# Altium PCB antivape_testbench.PcbDoc
Units mm, origin at the board's own origin, x right, y up, seen from the top; angles counter-clockwise.
Board outline 55 x 37 mm, 2 copper layers (Top Layer, Bottom Layer); 48 components, 19 nets, 162 pads, 0 vias.
Unrouted connection lines stored in the file: 98.
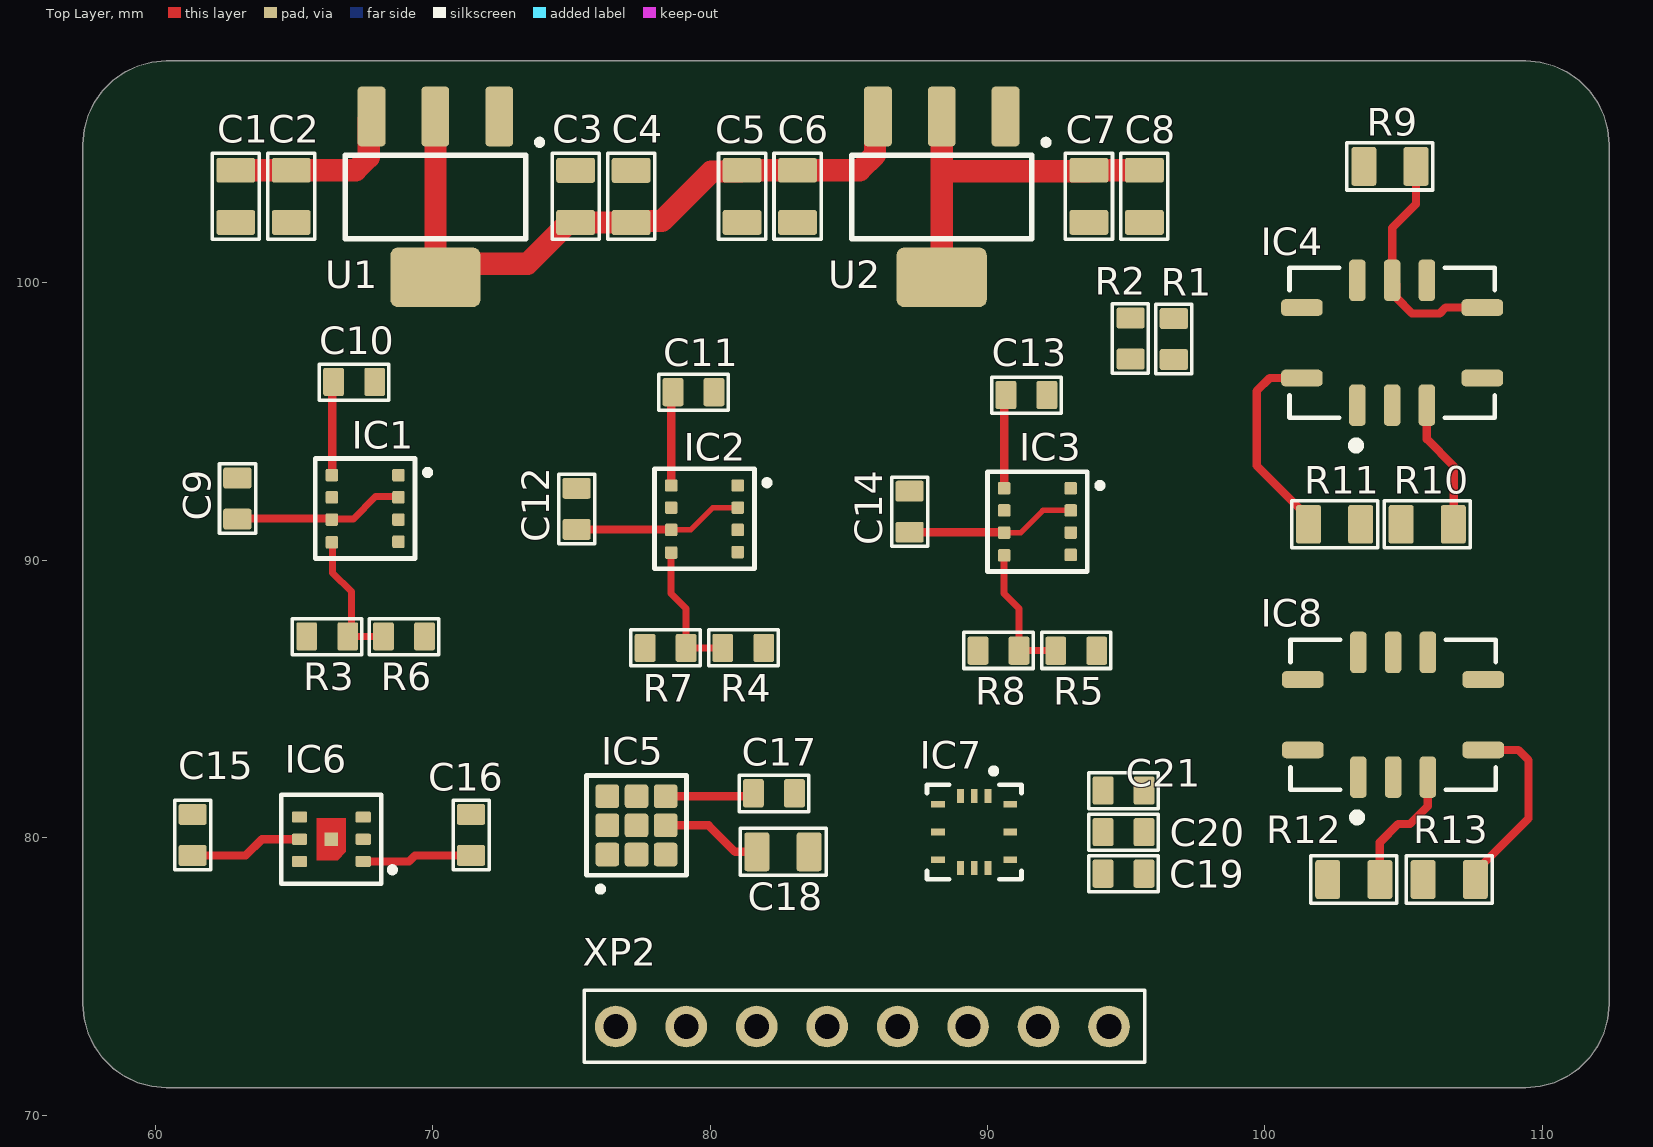
[diagram p0: Top Layer view]
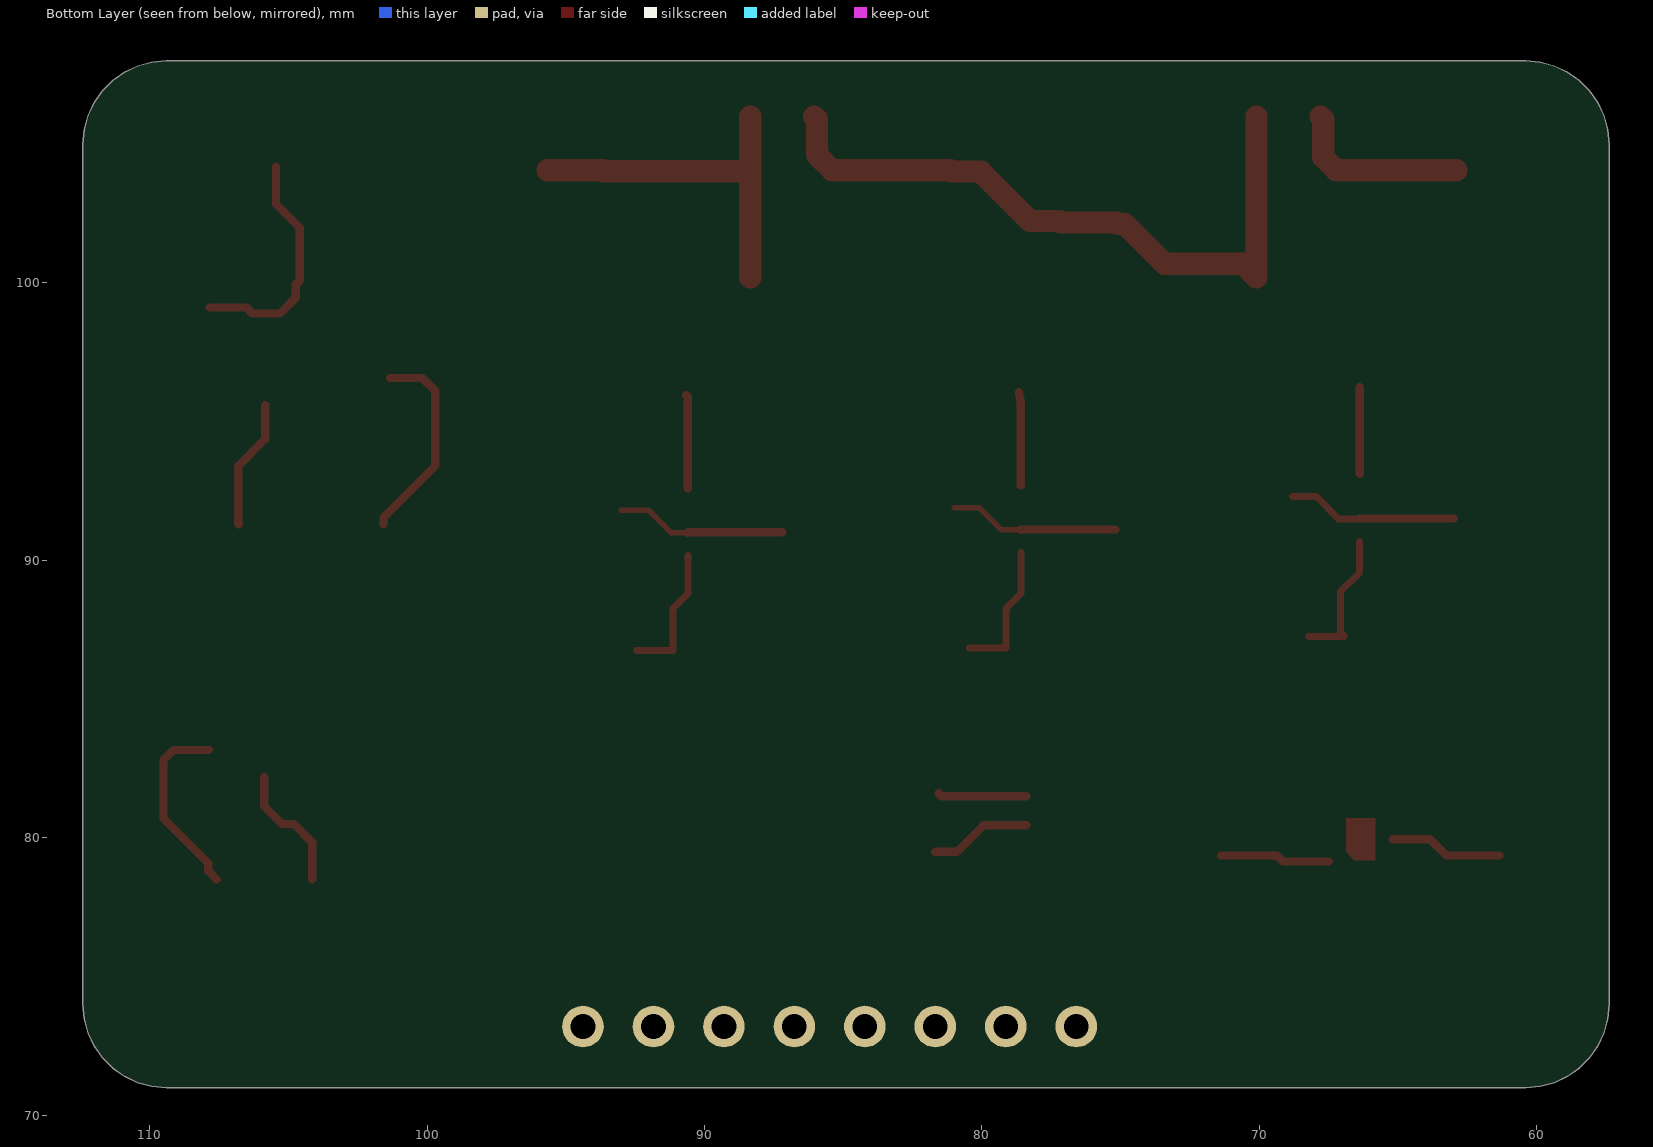
[diagram p1: Bottom Layer view, seen from below]

## Layer stack, top to bottom
Top Solder: solder mask 0.0102, Solder Resist, Dk 3.5
Top Layer: signal copper 0.0356
Dielectric 1: dielectric 0.32, FR-4, Dk 4.8
Bottom Layer: signal copper 0.0356
Bottom Solder: solder mask 0.0102, Solder Resist, Dk 3.5

## Board outline
109.4,71 109.921,71.046 110.426,71.181 110.9,71.402 111.328,71.702 111.698,72.072 111.998,72.5 112.219,72.974 112.354,73.479 112.4,74 112.4,105 112.354,105.521 112.219,106.026 111.998,106.5 111.698,106.928 111.328,107.298 110.9,107.598 110.426,107.819 109.921,107.954 109.4,108 60.4,108 59.879,107.954 59.374,107.819 58.9,107.598 58.472,107.298 58.102,106.928 57.802,106.5 57.581,106.026 57.446,105.521 57.4,105 57.4,74 57.446,73.479 57.581,72.974 57.802,72.5 58.102,72.072 58.472,71.702 58.9,71.402 59.374,71.181 59.879,71.046 60.4,71

## Design rules (kind name [scope] priority, off if disabled: settings)
BoardOutlineClearance [All] p1: gap=0.5 ignorepadtopadclearanceinfootprint=FALSE
Clearance "Stitching GND" [IsStitchingVia and InNet('GND') vs (IsVia) Or IsPad] p1: gap=0.25 ignorepadtopadclearanceinfootprint=FALSE
Clearance Clearance_HV [All vs InNetClass('HV')] p2: gap=0.5 ignorepadtopadclearanceinfootprint=TRUE
Clearance Clearance_VCC [All vs InNetClass('VCC')] p3: gap=0.25 ignorepadtopadclearanceinfootprint=TRUE
Clearance [All] p4: gap=0.2 ignorepadtopadclearanceinfootprint=TRUE except(0.15: Arc-Arc Arc-Track Track-Track; 0.18: Arc-SMDPad Track-SMDPad SMDPad-SMDPad)
ComponentClearance [All] p1 off: gap=0.25 collisioncheckmode=3 verticalgap=0.254 showdistances=FALSE
DiffPairsRouting [All] p1: maxlimit=0.15 minlimit=0.15 mostfreqgap=0.15 toplayer_minwidth=0.28 toplayer_maxwidth=0.28 toplayer_prefwidth=0.28 bottomlayer_minwidth=0.28 bottomlayer_maxwidth=0.28 bottomlayer_prefwidth=0.28 impedanceprofiledriven=TRUE impedanceprofileid={6E4374B4-500F-4F2C-A5B9-4224AD78F660} maxuncoupledlength=12.7
Height [All] p1: minheight=0 maxheight=53 prefheight=12.7
HoleSize [All] p1: absolutevalues=TRUE maxlimit=4 minlimit=0.3 maxpercent=80.000 minpercent=20.000
MinimumSolderMaskSliver [All] p1: minsoldermaskwidth=0.05
PlaneConnect [All] p1: planeconnectstyle=Relief reliefexpansion=0.5 reliefentries=4 reliefconductorwidth=0.3 reliefairgap=0.2
PolygonConnect "PolygonConnect_ >7" [(AsMM(PadXSize_AllLayers)>7.01)or(AsMM(PadYSize_AllLayers)>7.01)] p1: thpad.connectstyle=Relief thpad.reliefconductorwidth=2 thpad.reliefentries=4 thpad.polygonreliefangle="90 Angle" thpad.airgapwidth=0.3 smdpad.connectstyle=Relief smdpad.reliefconductorwidth=3 smdpad.reliefentries=4 smdpad.polygonreliefangle="90 Angle" smdpad.airgapwidth=0.4 via.connectstyle=Direct via.reliefconductorwidth=2 via.reliefentries=4 via.polygonreliefangle="90 Angle" via.airgapwidth=0.3
PolygonConnect "PolygonConnect_ <= 1" [(AsMM(PadXSize_AllLayers)<=1.01)or(AsMM(PadYSize_AllLayers)<=1.01)] p2: thpad.connectstyle=Relief thpad.reliefconductorwidth=0.6 thpad.reliefentries=4 thpad.polygonreliefangle="90 Angle" thpad.airgapwidth=0.25 smdpad.connectstyle=Relief smdpad.reliefconductorwidth=0.6 smdpad.reliefentries=4 smdpad.polygonreliefangle="90 Angle" smdpad.airgapwidth=0.2 via.connectstyle=Direct via.reliefconductorwidth=0.254 via.reliefentries=4 via.polygonreliefangle="90 Angle" via.airgapwidth=0.254
PolygonConnect "PolygonConnect_ <= 1.4" [(AsMM(PadXSize_AllLayers)<=1.41)or(AsMM(PadYSize_AllLayers)<=1.41)] p3: thpad.connectstyle=Relief thpad.reliefconductorwidth=0.6 thpad.reliefentries=4 thpad.polygonreliefangle="90 Angle" thpad.airgapwidth=0.25 smdpad.connectstyle=Relief smdpad.reliefconductorwidth=0.8 smdpad.reliefentries=4 smdpad.polygonreliefangle="90 Angle" smdpad.airgapwidth=0.2 via.connectstyle=Direct via.reliefconductorwidth=0.254 via.reliefentries=4 via.polygonreliefangle="90 Angle" via.airgapwidth=0.254
PolygonConnect "PolygonConnect_ <= 1.6" [(AsMM(PadXSize_AllLayers)<=1.61)or(AsMM(PadYSize_AllLayers)<=1.61)] p4: thpad.connectstyle=Relief thpad.reliefconductorwidth=0.8 thpad.reliefentries=4 thpad.polygonreliefangle="90 Angle" thpad.airgapwidth=0.25 smdpad.connectstyle=Relief smdpad.reliefconductorwidth=1 smdpad.reliefentries=4 smdpad.polygonreliefangle="90 Angle" smdpad.airgapwidth=0.2 via.connectstyle=Direct via.reliefconductorwidth=0.254 via.reliefentries=4 via.polygonreliefangle="90 Angle" via.airgapwidth=0.254
PolygonConnect "PolygonConnect_ <= 1.8" [(AsMM(PadXSize_AllLayers)<=1.81)or(AsMM(PadYSize_AllLayers)<=1.81)] p5: thpad.connectstyle=Relief thpad.reliefconductorwidth=1 thpad.reliefentries=4 thpad.polygonreliefangle="90 Angle" thpad.airgapwidth=0.25 smdpad.connectstyle=Relief smdpad.reliefconductorwidth=1.2 smdpad.reliefentries=4 smdpad.polygonreliefangle="90 Angle" smdpad.airgapwidth=0.2 via.connectstyle=Direct via.reliefconductorwidth=0.254 via.reliefentries=4 via.polygonreliefangle="90 Angle" via.airgapwidth=0.254
PolygonConnect "PolygonConnect_ <= 2" [(AsMM(PadXSize_AllLayers)<=2.01)or(AsMM(PadYSize_AllLayers)<=2.01)] p6: thpad.connectstyle=Relief thpad.reliefconductorwidth=1.2 thpad.reliefentries=4 thpad.polygonreliefangle="90 Angle" thpad.airgapwidth=0.25 smdpad.connectstyle=Relief smdpad.reliefconductorwidth=1.4 smdpad.reliefentries=4 smdpad.polygonreliefangle="90 Angle" smdpad.airgapwidth=0.2 via.connectstyle=Direct via.reliefconductorwidth=0.254 via.reliefentries=4 via.polygonreliefangle="90 Angle" via.airgapwidth=0.254
PolygonConnect "PolygonConnect_ <= 7" [(AsMM(PadXSize_AllLayers)<=7.01)or(AsMM(PadYSize_AllLayers)<=7.01)] p7: thpad.connectstyle=Relief thpad.reliefconductorwidth=1.8 thpad.reliefentries=4 thpad.polygonreliefangle="90 Angle" thpad.airgapwidth=0.25 smdpad.connectstyle=Relief smdpad.reliefconductorwidth=2 smdpad.reliefentries=4 smdpad.polygonreliefangle="90 Angle" smdpad.airgapwidth=0.25 via.connectstyle=Direct via.reliefconductorwidth=0.254 via.reliefentries=4 via.polygonreliefangle="90 Angle" via.airgapwidth=0.254
PolygonConnect PolygonConnect_Thermal [InPadClass('Thermal_diff')] p8: connectstyle=Direct reliefconductorwidth=0.254 reliefentries=4 polygonreliefangle="90 Angle" airgapwidth=0.254
PolygonConnect PolygonConnect_Power [InPadClass('Power_diff')] p9: connectstyle=Relief reliefconductorwidth=0.5 reliefentries=4 polygonreliefangle="90 Angle" airgapwidth=0.25
PolygonConnect [All] p10: thpad.connectstyle=Relief thpad.reliefconductorwidth=0.8 thpad.reliefentries=4 thpad.polygonreliefangle="90 Angle" thpad.airgapwidth=0.25 smdpad.connectstyle=Relief smdpad.reliefconductorwidth=0.8 smdpad.reliefentries=4 smdpad.polygonreliefangle="90 Angle" smdpad.airgapwidth=0.2 via.connectstyle=Direct via.reliefconductorwidth=0.254 via.reliefentries=4 via.polygonreliefangle="90 Angle" via.airgapwidth=0.254
RoutingVias [All] p1: holewidth=0.3 width=0.6 viastyle="Through Hole" minholewidth=0.3 minwidth=0.6 maxholewidth=0.7 maxwidth=1.2
SilkToSilkClearance [All] p1: silktosilkclearance=0
SilkToSolderMaskClearance [IsPad] p1: minsilkscreentomaskgap=0 clearancetoexposedcopper=TRUE
SolderMaskExpansion [All] p1: expansion=0.05 istentingtop=FALSE
UnRoutedNet [All] p1: checkbadconnections=TRUE
Width [All] p1: maxlimit=3 minlimit=0.15 preferedwidth=0.3
21 further rules are at their usual default settings.

## Components (designator, comment, footprint, x,y, rotation, side; value= is the part's Value field where it differs from the comment)
C1 "10uF" CAP0805 62.905,103.12 r90 top
C2 "0.1uF" CAP0805 64.905,103.12 r90 top
C3 "0.1uF" CAP0805 75.155,103.12 r270 top
C4 "10uF" CAP0805 77.155,103.12 r270 top
C5 "10uF" CAP0805 81.155,103.12 r90 top
C6 "0.1uF" CAP0805 83.155,103.12 r90 top
C7 "0.1uF" CAP0805 93.655,103.12 r90 top
C8 "10uF" CAP0805 95.655,103.12 r90 top
C9 "0.1uF" CAP0603 62.97,92.226 r270 top
C10 "0.1uF" CAP0603 67.17,96.426 r180 top
C11 "0.1uF" CAP0603 79.4,96.054 r180 top
C12 "0.1uF" CAP0603 75.2,91.854 r270 top
C13 "0.1uF" CAP0603 91.4,95.954 r180 top
C14 "0.1uF" CAP0603 87.2,91.754 r270 top
C15 "1uF" CAP0603 61.359,80.102 r270 top
C16 "1uF" CAP0603 71.392,80.102 r270 top
C17 "0.1uF" CAP0603 82.3,81.6 r180 top
C18 "10uF" CAP0805 82.631,79.495 r180 top
C19 "0.1uF" CAP0603 94.9,78.7 r180 top
C20 "0.1uF" CAP0603 94.9,80.2 r180 top
C21 "0.1uF" CAP0603 94.9,81.7 r180 top
C22 "0.1uF" CAP0805 186.6,39.2 r0 top
C23 "10uF" CAP0805 191.1,39.2 r0 top
IC1 "BME680" BMEXXX 67.57,91.872 r0 top
IC2 "BME688" BMEXXX 79.8,91.5 r0 top
IC3 "BME690" BMEXXX 91.8,91.4 r0 top
IC4 "MiCS-6814" MiCS-6814 104.582,97.843 r90 top
IC5 "ENS160" ENS160 77.35,80.45 r90 top
IC6 "SGP41" SGP41-D-R4 66.35,79.95 r180 top
IC7 "ZMOD4410" ZMOD4410 89.522,80.211 r180 top
IC8 "MiCS-5524" MiCS-6814 104.618,84.439 r90 top
R1 "4.7K" RES0603 96.706,97.982 r90 top
R2 "4.7K" RES0603 95.15,98 r90 top
R3 "0R" RES0603 66.2,87.254 r180 top
R4 "0R" RES0603 81.2,86.854 r0 top
R5 "0R" RES0603 93.2,86.754 r0 top
R6 "0R" RES0603 68.967,87.254 r180 top
R7 "0R" RES0603 78.4,86.854 r0 top
R8 "0R" RES0603 90.4,86.754 r0 top
R9 "820R" RES0805 104.5,104.2 r0 top
R10 "27R" RES0805 105.85,91.3 r180 top
R11 "130R" RES0805 102.508,91.3 r0 top
R12 "82R" RES0805 103.2,78.5 r0 top
R13 "10K" RES0805 106.638,78.5 r0 top
U1 "AMS1117-3.3" SOT-223 70.155,103.37 r180 top
U2 "AMS1117-3.3" SOT-223 88.405,103.37 r180 top
XP1 "Conn-2" PLS-2 198,35.6 r0 top
XP2 "Conn-8" "PLS 8x2.54" 76.6,73.2 r0 top

## Footprints (in the part's own frame and the unit in brackets; to place one, negate y for a bottom-side part, rotate by r counter-clockwise, add the part's x,y. Pads: shape width x height; smd on the part's side, far side on the other; paste and mask are expansions set on the pad)
BMEXXX [mm]
  rrect25% 0.45x0.45 smd: 1(1.2,1.2) 2(1.2,0.4) 3(1.2,-0.4) 4(1.2,-1.2) 5(-1.2,-1.22) 6(-1.2,-0.4) 7(-1.2,0.4) 8(-1.2,1.2)
  silkscreen extent -1.8,-1.8 2.35,1.8, body extent -1.5,-1.5 1.5,1.5, height 1
CAP0603 [mm] "SMD ceramic capacitor 0603"
  rrect20% 0.75x1.016 smd: 1(-0.743,-0.008) 2(0.737,-0.008)
  silkscreen extent -1.25,-0.65 1.25,0.65, body extent -0.8,-0.43 0.8,0.37, height 0.8
CAP0805 [mm] "SMD ceramic capacitor 0805"
  rrect20% 0.9x1.397 smd: 1(-0.938,0) 2(0.942,0)
  silkscreen extent -1.55,-0.85 1.55,0.85, body extent -1,-0.63 1,0.62, height 1.24
ENS160 [mm]
  rrect25% 0.85x0.85 smd mask+0.05: 1(-1.05,1.05) 2(-1.05,0) 3(-1.05,-1.05) 4(0,-1.05) 5(1.05,-1.05) 6(1.05,0) 7(1.05,1.05) 8(0,1.05) 9(0,0)
  silkscreen extent -2.4,-1.8 1.8,1.8, body extent -1.5,-1.5 1.5,1.5, height 0.9
MiCS-6814 [mm]
  rrect50% 1.5x0.6 smd: A(-2.25,1.25) B(-2.25,0) C(-2.25,-1.25) F(2.25,-1.25) G(2.25,0) H(2.25,1.25)
  rrect50% 0.6x1.5 smd: D(-1.27,-3.25) E(1.27,-3.25) J(1.27,3.25) K(-1.27,3.25)
  silkscreen extent -3.84,-3.7 2.7,3.7, body extent -2.5,-3.5 2.5,3.5, height 1.92
"PLS 8x2.54" [mm]
  round 1.5 hole 0.89: 1(0,0) 2(2.54,0) 3(5.08,0) 4(7.62,0) 5(10.16,0) 6(12.7,0) 7(15.24,0) 8(17.78,0)
  silkscreen extent -1.13,-1.29 19.06,1.31, body extent -1.39,-1.27 19.06,1.27, height 8.38
PLS-2 [mm]
  round 1.5 hole 0.89: 1(1.27,-0.005) 2(-1.27,-0.005)
  silkscreen extent -2.54,-1.3 2.55,1.3, body extent -2.54,-1.29 2.54,1.25, height 8.6
RES0603 [mm] "SMD resistor 0603"
  rrect20% 0.75x1.016 smd: 1(-0.743,-0.008) 2(0.737,-0.008)
  silkscreen extent -1.25,-0.65 1.25,0.65, body extent -0.8,-0.4 0.8,0.4, height 0.44
RES0805 [mm] "SMD resistor 0805"
  rrect20% 0.9x1.397 smd: 1(-0.938,0) 2(0.942,0)
  silkscreen extent -1.55,-0.85 1.55,0.85, body extent -1,-0.63 1,0.62, height 0.5
SGP41-D-R4 [mm]
  rrect25% 0.55x0.4 smd: 1(-1.15,0.8) 2(-1.15,0) 3(-1.15,-0.8) 4(1.15,-0.8) 5(1.15,0) 6(1.15,0.8)
  rect 0.5x0.5 smd paste-1 mask+0: 7(0,0)
  Top Layer region: 0.525,-0.75 -0.525,-0.75 -0.525,0.45 -0.225,0.75 0.525,0.75
  silkscreen extent -2.3,-1.6 1.8,1.6, body extent -1.22,-1.22 1.22,1.22, height 0.95
SOT-223 [mm] "SOT-223"
  rrect25% 1x2.15 smd: 1(-2.245,-2.63) 2(0.055,-2.63) 3(2.355,-2.63)
  rrect25% 3.25x2.15 smd: 2(0.055,3.17)
  silkscreen extent -3.8,-1.8 3.3,1.77, body extent -3.2,-3.23 3.3,3.77, height 1.8
ZMOD4410 [mm]
  rect 0.25x0.5 smd: 1(-0.5,-1.3) 2(0,-1.3) 3(0.5,-1.3) 7(0.5,1.3) 8(0,1.3) 9(-0.5,1.3)
  rect 0.5x0.25 smd: 4(1.3,-1) 5(1.3,0) 6(1.3,1) 10(-1.3,1) 11(-1.3,0) 12(-1.3,-1)
  silkscreen extent -1.7,-2.3 1.7,1.7

## Part data
C1 C2 C3 C4 C5 C6 C7 C8 C9 C10 C11 C12 C13 C14 C15 C16 C17 C18 C19 C20 C21 C22 C23: library part "CAP Ceramic", "Ceramic SMD Cap"
IC6: library part SGP41-D-R4
R1 R2 R3 R4 R5 R6 R7 R8 R9 R10 R11 R12 R13: library part RES, "RES smd"
U1 U2: library part AMS1117, "Linear voltage regulator", ComponentLink1Description=ChipDip, ComponentLink1URL=https://www.chipdip.ru/product0/9001729041

## Nets (pads, with @x,y where several pads share a name; then routed paths per layer and width w, separated by ;. In a path a pad name is that pad's centre, name@x,y a point inside that pad or via, vN(x,y) a via of type N, cw(c..) or ccw(c..) an arc to the next point about the centre after c; other vN are vias at no path point)
+1V8: C7.2 C8.2 C18.2 IC5.4 U2.2 | length 16.8
  Top Layer w0.3: IC5.4 79.95,80.45 80.905,79.495 C18.2
  Top Layer w0.8: U2.2@88.35,100.2 88.35,103.92 ; U2.2@88.35,106 88.35,103.92 ; C8.2 C7.2 93.618,104.025 88.455,104.025 88.35,103.92
+3V3: C3.2 C4.2 C5.2 C6.2 C9.2 C10.2 C11.2 C12.2 C13.2 C14.2 C15.2 C16.2 C17.2 C19.2 C20.2 C21.2 IC1.2 IC1.6 IC1.8 IC2.2 IC2.6 IC2.8 IC3.2 IC3.6 IC3.8 IC5.5 IC5.7 IC6.1 IC6.5 IC7.5 IC7.10 IC7.11 IC7.12 R1.2 R2.2 R3.2 R4.2 R5.2 U1.2 U2.3 | length 64.5
  Top Layer w0.2: IC2.6 79.3,91.1 80.1,91.9 IC2.2 ; IC3.6 91.2,91 92,91.8 IC3.2
  Top Layer w0.25: C9.2@62.992,91.517 C9.2@63,91.508 ; IC1.8@66.382,93.118 IC1.8@66.4,93.1 ; IC1.6@66.392,91.508 66.4,91.5 67.146,91.5 67.946,92.3 IC1.2@68.8,92.3
  Top Layer w0.3: C15.2 63.265,79.365 63.85,79.95 IC6.5 ; C9.2@63,91.508 IC1.6@66.392,91.508 ; IC1.8@66.382,93.118 C10.2@66.382,96.244 ; IC6.1 69.15,79.15 69.365,79.365 C16.2 ; C12.2 78.583,91.117 IC2.6 ; IC5.5 81.455,81.5 C17.2 ; IC2.8 78.6,95.704 C11.2 ; C14.2 90.583,91.017 IC3.6 ; IC3.8 90.6,95.899 C13.2
  Top Layer w0.8: U1.2@70.1,106 70.1,100.2 70.59,100.69 73.419,100.69 74.856,102.128 75.105,102.128 C3.2 C4.2 77.205,102.228 78.263,102.228 80.047,104.012 81.105,104.012 C5.2 C6.2 85.397,104.062 85.95,104.615 85.95,105.9 U2.3
+5V: C1.2 C2.2 C22.2 C23.2 IC8.F IC8.G R9.1 R10.2 R11.2 U1.3 XP1.1 | length 6.7
  Top Layer w0.8: C1.2 C2.2@65.153,104.062 ; C2.2 67.231,104.062 67.7,104.531 67.7,105.9 U1.3
ENS160_INT: IC5.6 XP2.3
GND: C1.1 C2.1 C3.1 C4.1 C5.1 C6.1 C7.1 C8.1 C9.1 C10.1 C11.1 C12.1 C13.1 C14.1 C15.1 C16.1 C17.1 C18.1 C19.1 C20.1 C21.1 C22.1 C23.1 IC1.1 IC1.7 IC2.1 IC2.7 IC3.1 IC3.7 IC4.B IC4.F IC4.J IC5.3 IC5.8 IC5.9 IC6.2 IC6.7 IC7.6 IC7.7 IC7.9 R6.1 R7.1 R8.1 R12.1 R13.1 U1.1 U2.1 XP1.2
I2C_SCL: IC1.4 IC2.4 IC3.4 IC5.2 IC6.6 IC7.1 R1.1 XP2.1
I2C_SDA: IC1.3 IC2.3 IC3.3 IC5.1 IC6.3 IC7.2 R2.1 XP2.2
MICS1_CO_VALUE: IC4.H XP2.5
MICS1_NH3_VALUE: IC4.D XP2.6
MICS1_NO2_VALUE: IC4.A XP2.7
MICS2_CO_VALUE: IC8.D R13.2 XP2.8 | length 6.9
  Top Layer w0.3: R13.2 107.88,78.8 107.88,79.08 109.5,80.7 109.5,82.8 109.131,83.169 IC8.D
NetIC1_5: IC1.5 R3.1 R6.2 | length 5
  Top Layer w0.25: IC1.5@66.4,90.68 66.4,89.554 67.073,88.881 67.073,87.392 R3.1 R6.2
NetIC2_5: IC2.5 R4.1 R7.2 | length 5
  Top Layer w0.25: IC2.5 78.6,88.8 79.137,88.263 R7.2 R4.1
NetIC3_5: IC3.5 R5.1 R8.2 | length 5
  Top Layer w0.25: IC3.5 90.6,88.8 91.137,88.263 R8.2 R5.1
NetIC4_C: IC4.C R10.1 | length 4.7
  Top Layer w0.3: IC4.C 105.832,94.368 106.8,93.4 106.8,91.312 R10.1
NetIC4_E: IC4.E IC4.G R9.2 | length 8.6
  Top Layer w0.3: R9.2 105.442,102.842 104.582,101.982 IC4.G 104.732,99.943 104.732,99.468 105.3,98.9 106.3,98.9 106.513,99.113 IC4.E
NetIC4_K: IC4.K R11.1 | length 7.4
  Top Layer w0.3: IC4.K 100.173,96.573 99.7,96.1 99.7,93.418 101.57,91.548 R11.1
NetIC8_C: IC8.C R12.2 | length 4.7
  Top Layer w0.3: R12.2 104.142,79.842 104.8,80.5 105.224,80.5 105.868,81.144 IC8.C
ZMOD_INT: IC7.3 XP2.4
pads on no net: IC6.4 IC7.4 IC7.8 IC8.A IC8.B IC8.E IC8.H IC8.J IC8.K